# Altium PCB Copy of NRF_remote_control_Save.PcbDoc
Units mil, origin at the board's own origin, x right, y up, seen from the top; angles counter-clockwise.
Board outline 3385.83 x 1811.02 mil, 2 copper layers (Top Layer, Bottom Layer), stack 62.17 mil thick; 69 components, 57 nets, 328 pads, 81 vias.
Unrouted connection lines stored in the file: 39.
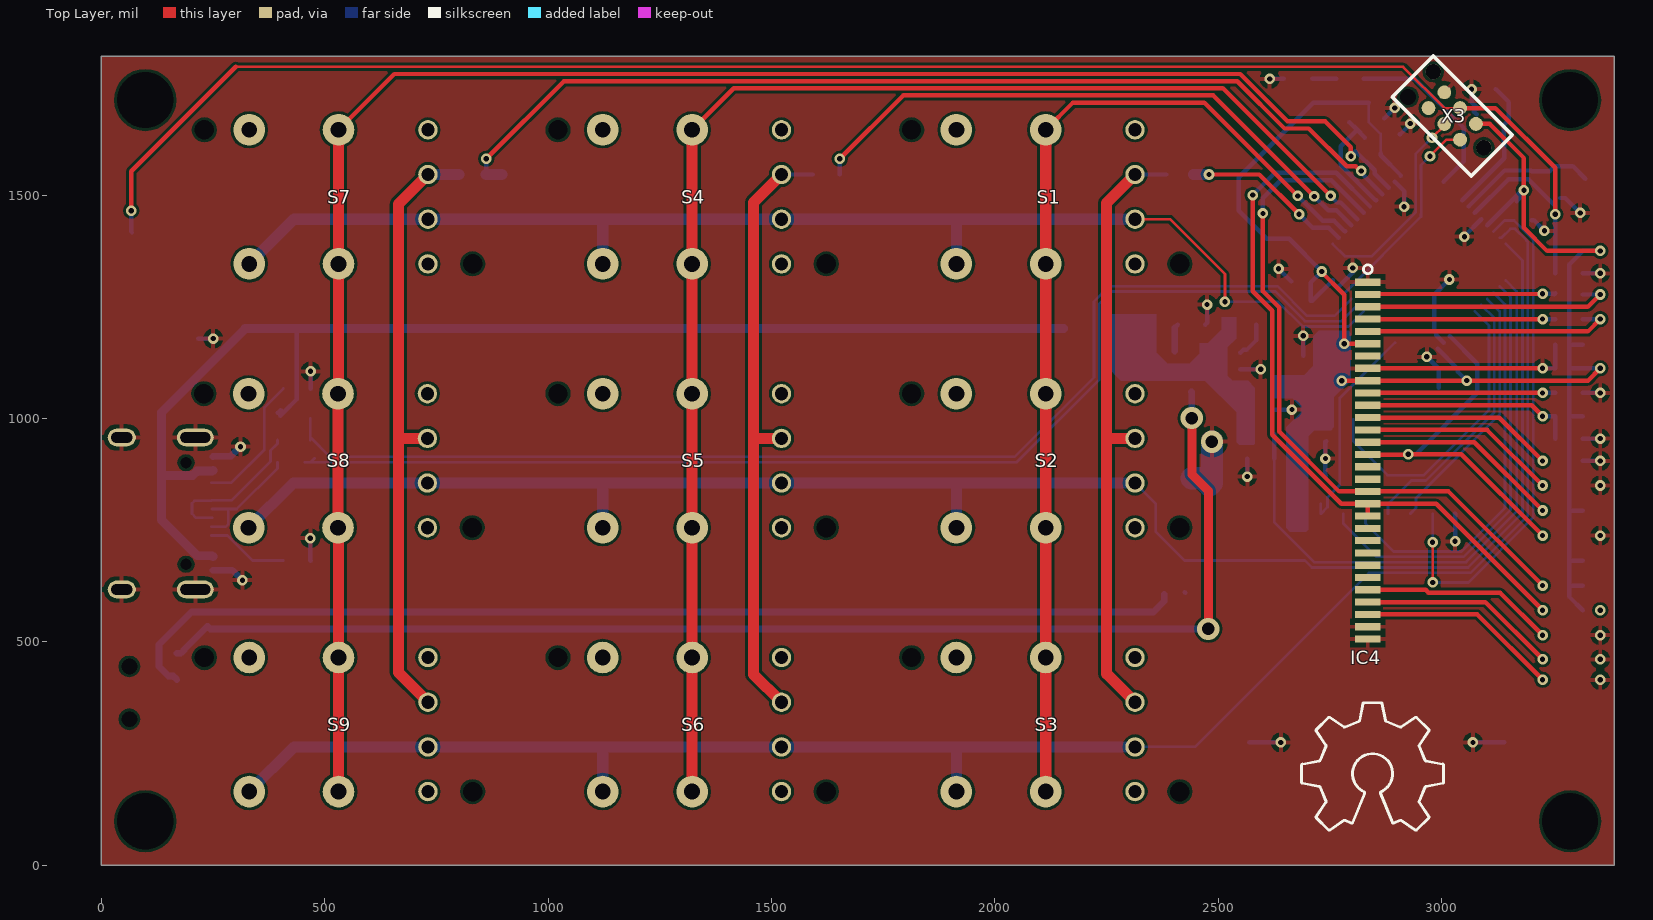
[diagram p0: Top Layer view]
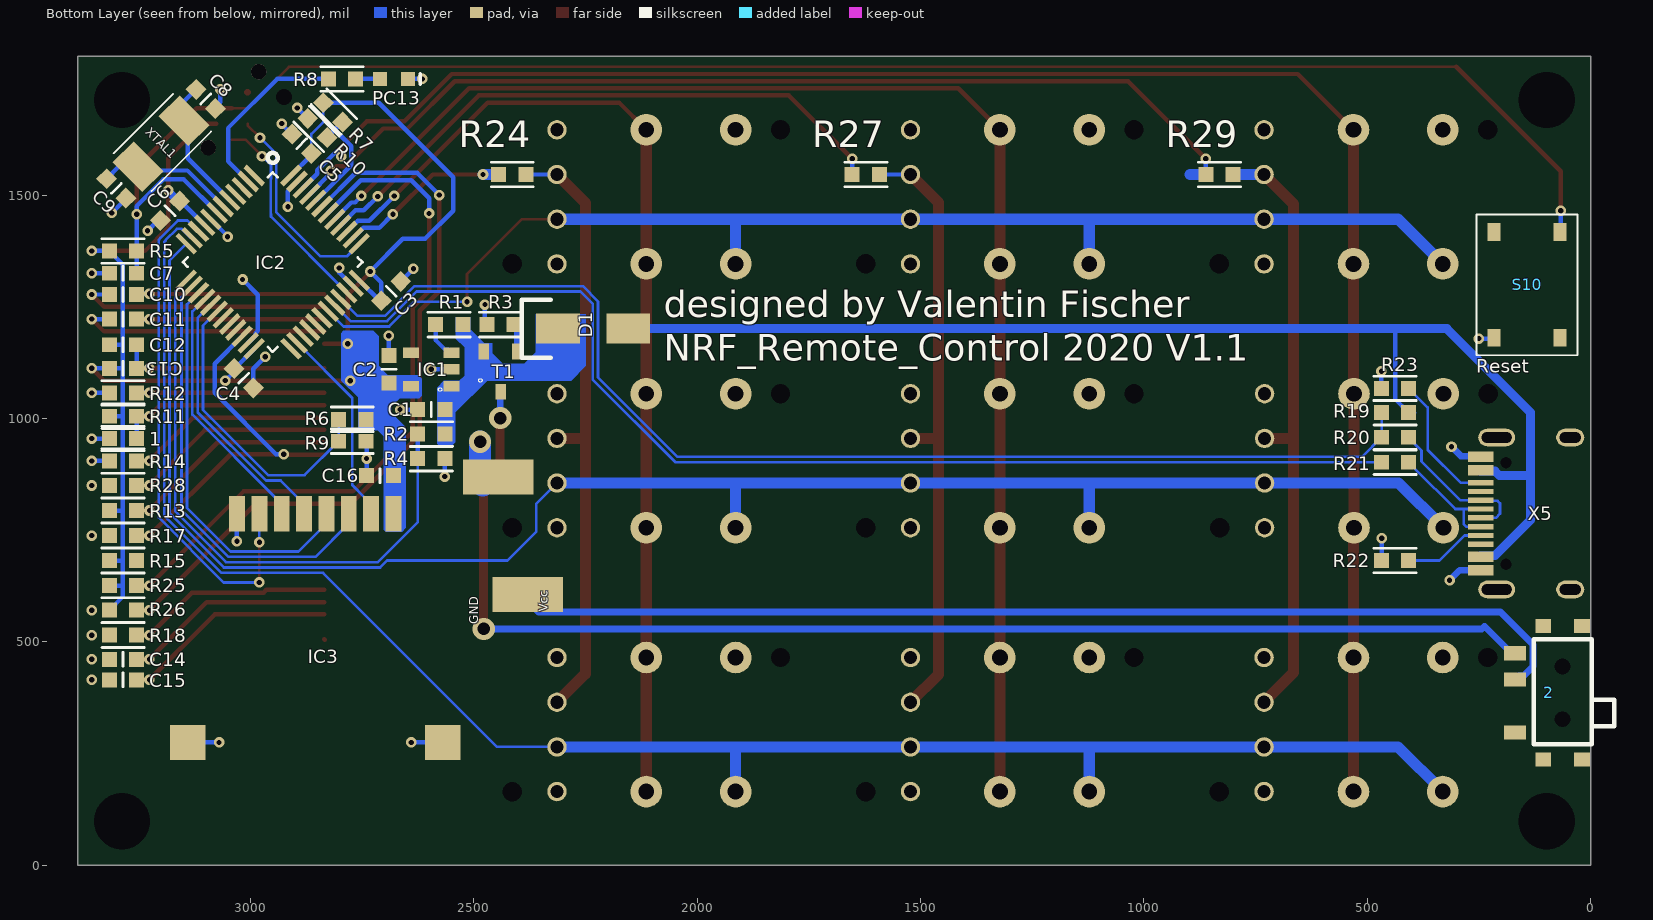
[diagram p1: Bottom Layer view, seen from below]

## Layer stack, top to bottom
Top Solder: solder mask 0.4, Solder Resist, Dk 3.5
Top Layer: signal copper 1.4
Dielectric 1: dielectric 59.3701, FR-4, Dk 4.8
Bottom Layer: signal copper 1.4
Bottom Solder: solder mask 0.4, Solder Resist, Dk 3.5

## Board outline
0,0 3385.83,0 3385.83,1811.02 0,1811.02

## Design rules (kind name [scope] priority, off if disabled: settings)
Clearance [All] p1: gap=6 ignorepadtopadclearanceinfootprint=FALSE except(0: Arc-Hole Track-Hole SMDPad-Hole THPad-Hole Via-Hole Fill-Hole Poly-Hole Region-Hole Text-Hole)
HoleSize [All] p1: absolutevalues=TRUE maxlimit=248.03 minlimit=7.87 maxpercent=80.000 minpercent=20.000
MinimumSolderMaskSliver [All] p1: minsoldermaskwidth=6
PolygonConnect [All] p1: connectstyle=Relief reliefconductorwidth=10 reliefentries=4 polygonreliefangle="90 Angle" airgapwidth=10
RoutingVias [All] p1: holewidth=11.81 width=23.62 viastyle="Through Hole" minholewidth=7.87 minwidth=17.72 maxholewidth=248.03 maxwidth=472.44
SilkToSilkClearance [All] p1: silktosilkclearance=5
SilkToSolderMaskClearance [IsPad] p1: minsilkscreentomaskgap=5 clearancetoexposedcopper=TRUE
SolderMaskExpansion [All] p1: expansion=3
Width [All] p1: maxlimit=100 minlimit=5 preferedwidth=10 minimp=50.000000 maximp=50.000000 favimp=50.000000
26 further rules are at their usual default settings.

## Classes and differential pairs
component class NRF_remote_control_matrix_oled: 1 C10 C11 C12 C13 C14 C15 IC4 R11 R12 R13 R14 R15 R17 R18 R24 R25 R26 R27 R28 R29 S1 S2 S3 S4 S5 S6 S7 S8 S9
component class NRF_remote_control_main: 2 C1 C2 C3 C4 C5 C6 C7 C8 C9 C16 D1 GND IC1 IC2 IC3 PC13 R1 R2 R3 R4 R5 R6 R7 R8 R9 R10 R19 R20 R21 R22 R23 S10 T1 Vcc X3 X5 XTAL1

## Components (designator, comment, footprint, x,y, rotation, side; value= is the part's Value field where it differs from the comment)
1 "10k" SMD-0603-RES 3285,955 r90 bottom
2 "Switch" K3-1296S-J1 63,386 r180 bottom
C1 "1µF" SMD-0603C 2595,1020 r270 bottom
C2 "1µF" SMD-0603C 2690,1110 r0 bottom
C3 "0.10µF" SMD-0603C 2685,1285 r45 bottom
C4 "0.10µF" SMD-0603C 3015,1090 r135 bottom
C5 "0.10µF" SMD-0603C 2885,1615 r315 bottom
C6 "0.10µF" SMD-0603C 3180,1465 r225 bottom
C7 "0.10µF" SMD-0603C 3285,1325 r270 bottom
C8 "20pF" SMD-0603C 3100,1715 r315 bottom
C9 "20pF" SMD-0603C 3300,1515 r315 bottom
C10 "2.2µF" SMD-0603C 3285,1277.5 r90 bottom
C11 "2.2µF" SMD-0603C 3285,1222.44 r90 bottom
C12 "2.2µF" SMD-0603C 3285,1165 r270 bottom
C13 "2.2µF" SMD-0603C 3285,1112.2 r270 bottom
C14 "2.2µF" SMD-0603C 3285,461 r90 bottom
C15 "10µF" SMD-0603C 3285,415 r90 bottom
C16 "0.10µF" SMD-0603C 2710,872 r270 bottom
D1 "SS34" B240A 2233,1201 r0 bottom
GND "SMD_Pad" SMD_Pad 2435,919 r90 bottom (schematic designator X2)
IC1 "AP2112" SOT23-5 2595,1110 r90 bottom
IC2 "STM32F072C8U6" LQFP-48 2950,1350 r225 bottom
IC3 "NRF24" ML01SP4 2679.76,786.81 r0 bottom locked
IC4 "UG-2864KSWLG01" UG-2864KSWLG01 2834.65,905.51 r270 top locked
PC13 "150060SS75000" 0603_A 2678.5,1760 r0 bottom (schematic designator LED1)
R1 "100k" SMD-0603-RES 2555,1210 r90 bottom
R2 "100k" SMD-0603-RES 2595,965 r90 bottom
R3 "100k" SMD-0603-RES 2440,1210 r90 bottom
R4 "100k" SMD-0603-RES 2595,910 r270 bottom
R5 "10k" SMD-0603-RES 3285,1375 r270 bottom
R6 "10k" SMD-0603-RES 2772,998 r90 bottom
R7 "10k" SMD-0603-RES 2815,1685 r315 bottom
R8 "330" SMD-0603-RES 2795,1760 r90 bottom
R9 "10k" SMD-0603-RES 2772,949 r270 bottom
R10 "10k" SMD-0603-RES 2850,1650 r135 bottom
R11 "10k" SMD-0603-RES 3285,1005 r270 bottom
R12 "10k" SMD-0603-RES 3285,1057.09 r270 bottom
R13 "10k" SMD-0603-RES 3285,794 r90 bottom
R14 "10k" SMD-0603-RES 3285,905 r90 bottom
R15 "10k" SMD-0603-RES 3285,682 r270 bottom
R17 "10k" SMD-0603-RES 3285,738 r90 bottom
R18 "390k" SMD-0603-RES 3285,515 r90 bottom
R19 "4.7k" SMD-0603-RES 438,1013 r90 bottom
R20 "20" SMD-0603-RES 438,958 r90 bottom
R21 "20" SMD-0603-RES 438,902 r90 bottom
R22 "5.1k" SMD-0603-RES 438,682 r270 bottom
R23 "5.1k" SMD-0603-RES 438,1067 r90 bottom
R24 "0.0" SMD-0603-RES 2413.86,1546.06 r270 bottom
R25 "4.7k" SMD-0603-RES 3285,626 r270 bottom
R26 "4.7k" SMD-0603-RES 3285,571 r270 bottom
R27 "0.0" SMD-0603-RES 1622.52,1546.06 r270 bottom
R28 "10k" SMD-0603-RES 3285,850 r90 bottom
R29 "0.0" SMD-0603-RES 831.18,1546.06 r270 bottom
S1 "MP86A0BUH-G" MP86A0BUH-G#1 2113.86,1496.06 r270 top locked
S2 "MP86A0BUH-G" MP86A0BUH-G#1 2113.86,905.51 r270 top locked
S3 "MP86A0BUH-G" MP86A0BUH-G#1 2113.86,314.96 r270 top locked
S4 "MP86A0BUH-G" MP86A0BUH-G#1 1322.52,1496.06 r270 top locked
S5 "MP86A0BUH-G" MP86A0BUH-G#1 1322.52,905.51 r270 top locked
S6 "MP86A0BUH-G" MP86A0BUH-G#1 1322.52,314.96 r270 top locked
S7 "MP86A0BUH-G" MP86A0BUH-G#1 531.18,1496.06 r270 top locked
S8 "MP86A0BUH-G" MP86A0BUH-G#1 530,905.51 r270 top locked
S9 "MP86A0BUH-G" MP86A0BUH-G#2 531.18,314.96 r270 top locked
S10 "Button" Button5050 216.54,1181.1 r90 bottom
T1 "AO3401" SOT23 2440,1105 r180 bottom
Vcc "SMD_Pad" SMD_Pad 2389,556 r270 bottom (schematic designator X1)
X3 "ICSP" TC2030-MCP-NL 3094.39,1606.26 r135 top
X5 "USB-C" USB-C 46,787.4 r90 bottom
XTAL1 "Crystal 5032" 5032 3200,1615 r315 bottom
? "OpenHardware" OpenHardware 2845,206 r0 top

## Footprints (in the part's own frame and the unit in brackets; to place one, negate y for a bottom-side part, rotate by r counter-clockwise, add the part's x,y. Pads: shape width x height; smd on the part's side, far side on the other; paste and mask are expansions set on the pad)
0603_A [mm] "Chip LED, 2-Leads, Body 1.6x0.8mm, IPC Medium Density"
  rect 0.8x0.8 smd: 1(-0.8,0) 2(0.8,0)
  silkscreen extent -1.5,-0.3 -1.5,0.3, body extent -0.8,-0.4 0.8,0.4, height 0.7
5032 [mm]
  rect 1.7x2.4 smd: 1(-1.85,0) 2(1.85,0)
  silkscreen extent -2.5,-1.52 2.29,1.52, body extent -2.5,-1.6 2.5,1.6, height 1.31
B240A [mm]
  rect 2.5x1.7 smd: A(-2,0) K(2,0)
  silkscreen extent 2.41,-1.65 4.06,1.65, body extent -2.03,-0.89 2.03,0.89, height 1.52
Button5050 [mm]
  rect 1x0.75 smd: 1(0,0) 2(6,-3.75) 3(0,-3.75) 4(6,0)
  silkscreen extent -1,-4.75 7,1, body extent -0.2,-4.44 6.3,0.64, height 1.52
K3-1296S-J1 [mm] "Toggle Switch C223848"
  rect 1.25x0.8 smd: 1(-2.7,2.25) 2(-2.7,-2.25) 3(-2.7,0.75)
  round 0 hole 0.9: 14(0,-1.5) 14(0,1.5)
  rect 0.9x0.8 smd: ""(-1.1,-3.8) ""(-1.1,3.8) ""(1.1,-3.8) ""(1.1,3.8)
  silkscreen extent -1.65,-2.92 2.92,3.05, body extent -2.5,-3.6 2.35,3.6, height 1.4
LQFP-48 [mil] "LQFP 48 Pins"
  rect 58x11 smd: 1(-166,108) 2(-166,89) 3(-166,69) 4(-166,49) 5(-166,30) 6(-166,10) 7(-166,-10) 8(-166,-30) 9(-166,-49) 10(-166,-69) 11(-166,-89) 12(-166,-108) 25(166,-108) 26(166,-89) 27(166,-69) 28(166,-49) 29(166,-30) 30(166,-10) 31(166,10) 32(166,30) 33(166,49) 34(166,69) 35(166,89) 36(166,108)
  rect 11x58 smd: 13(-108,-166) 14(-89,-166) 15(-69,-166) 16(-49,-166) 17(-30,-166) 18(-10,-166) 19(10,-166) 20(30,-166) 21(49,-166) 22(69,-166) 23(89,-166) 24(108,-166) 37(108,166) 38(89,166) 39(69,166) 40(49,166) 41(30,166) 42(10,166) 43(-10,166) 44(-30,166) 45(-49,166) 46(-69,166) 47(-89,166) 48(-108,166)
  silkscreen extent -176,-142 142,176, body extent -177,-180 177,175, height 58
ML01SP4 [mm] "NRF24"
  rect 0.9x2 smd: CE(1.27,0) CSN(2.54,0) GND(8.89,0) IRQ(7.62,0) MISO(6.35,0) MOSI(5.08,0) SCK(3.81,0) Vcc(0,0)
  rect 2x2 smd: GND(-2.8,13) GND(11.69,13)
  body extent -2.79,0 11.71,18, height 1.8
MP86A0BUH-G#1 [mm] "Button THT"
  round 1.8 hole 0.9: 1(-3.81,0) 1(3.81,0) 2(3.81,-5.08) 3(-3.81,-5.08)
  round 0 hole 1.1: 1(-3.81,-7.625) 1(3.81,7.625)
  round 1.1 hole 0.75: A(-3.81,5.08) B(-1.27,5.08) C(1.27,5.08) D(3.81,5.08)
  body extent -6.22,-8.8 6.28,8.8, height 14.95
MP86A0BUH-G#2 [mm] "Button THT"
  round 1.8 hole 0.9: 1(-3.81,0) 1(3.81,0) 2(3.81,-5.08) 3(-3.81,-5.08)
  round 1.1 hole 0.75: A(-3.81,5.08) B(-1.27,5.08) C(1.27,5.08) D(3.81,5.08)
  round 0 hole 1.1: ""(-3.81,-7.625) ""(3.81,7.625)
  body extent -6.22,-8.8 6.28,8.8, height 14.9
OpenHardware [mil]
  silkscreen extent -158,-128 159,158
SMD-0603-RES [mm]
  rect 0.85x0.85 smd: 1(0,0.775) 2(0,-0.775)
  silkscreen extent -0.7,-1.2 0.7,1.2, body extent -0.4,-0.85 0.4,0.85, height 0.56
SMD-0603C [mm]
  rect 0.85x0.85 smd: 1(0,0.775) 2(0,-0.775)
  silkscreen extent -0.4,0 0.4,0, body extent -0.4,-0.8 0.4,0.8, height 0.9
SMD_Pad [mm]
  rect 2x4 smd: 1(-1.27,0.254)
SOT23 [mm]
  rect 0.6x0.9 smd: D(0,-1.15) G(0.95,1.15) S(-0.95,1.15)
  silkscreen extent -1.25,-0.6 -1.05,-0.4, body extent -1.45,-1.17 1.45,1.43, height 1
SOT23-5 [mm]
  rect 0.6x0.9 smd: 1(-0.95,-1.15) 2(0,-1.15) 3(0.95,-1.15) 4(0.95,1.15) 5(-0.95,1.15)
  silkscreen extent -1.25,-0.6 -1.05,-0.4, body extent -1.4,-1.21 1.4,1.21, height 1.09
TC2030-MCP-NL [mil]
  round 31 smd: 1(50,-25) 2(50,25) 3(100,-25) 4(100,25) 5(150,-25) 6(150,25)
  round 34 hole 35 unplated: A(0,0) B(200,40) C(200,-40)
  silkscreen extent -25,-65 225,65
UG-2864KSWLG01 [mm] "OLED 1,3\" 128x64"
  rect 0.41x1.46 smd: 1(-10.15,0) 2(-9.45,0) 3(-8.75,0) 4(-8.05,0) 5(-7.35,0) 6(-6.65,0) 7(-5.95,0) 8(-5.25,0) 9(-4.55,0) 10(-3.85,0) 11(-3.15,0) 12(-2.45,0) 13(-1.75,0) 14(-1.05,0) 15(-0.35,0) 16(0.35,0) 17(1.05,0) 18(1.75,0) 19(2.45,0) 20(3.15,0) 21(3.85,0) 22(4.54,0) 23(5.24,0) 24(5.94,0) 25(6.64,0) 26(7.34,0) 27(8.04,0) 28(8.74,0) 29(9.44,0) 30(10.14,0)
  body extent -17,-8 17,16.5, height 5
USB-C [mm] "USB-C Buchse"
  round 0 hole 0.65: 1(-2.89,3.65) 1(2.89,3.65)
  rect 0.3x1.45 smd: CC1(-1.25,5.095) CC2(1.75,5.095) DN(-0.75,5.095) DN(0.25,5.095) DP(-0.25,5.095) DP(0.75,5.095) SBU1(-1.75,5.095) SBU2(1.25,5.095)
  oval 1x1.6 hole 0.6 slot 1.2 at 90 deg: GND(-4.32,0) GND(4.32,0)
  oval 1x2.1 hole 0.6 slot 1.7 at 90 deg: GND(-4.32,4.18) GND(4.32,4.18)
  rect 0.6x1.45 smd: GND(-3.225,5.095) GND(3.225,5.095) VBUS(-2.45,5.095) VBUS(2.45,5.095)
  body extent -4.47,-2.35 4.47,5.55, height 3.21

## Part data
1 R5 R6 R7 R9 R10 R11 R12 R13 R14 R15 R17 R28: library part ERJ-3EKF1002V, "RES SMD 10K OHM 1% 1/10W 0603", Digi-Key Part Number=P10.0KHCT-ND, Manufacturer="Panasonic Electronic Components", Operating Temperature="-55°C ~ 155°C", Package / Case="0603 (1608 Metric)", Power (Watts)="0.1W, 1/10W", Supplier Device Package=0603, Temperature Coefficient=±100ppm/°C, Tolerance=±1%, @ qty=1500, Composition="Thick Film", Datasheets=http://industrial.panasonic.com/www-cgi/jvcr13pz.cgi?E+PZ+3+AOA0002+ERJ3EKF1002V+7+WW, Factory Stock=0, Failure Rate=-, Features="Automotive AEC-Q200", Height - Seated (Max)="0.022\" (0.55mm)", Image=//media.digikey.com/Photos/Panasonic%20Photos/MFG_ERJ-P6W%20Series.jpg, Minimum Quantity=1, Number of Terminations=2, Packaging="Cut Tape (CT)", Part Number=ERJ-3EKF1002V, Part Status=Active, Quantity Available=6703141, Series=ERJ, Size / Dimension="0.063\" L x 0.031\" W (1.60mm x 0.80mm)", Unit Price (USD)=0.00379
C1 C2: library part GCM188R71C105KA64D, "CAP CER 1UF 16V X7R 0603", Digi-Key Part Number=490-5241-1-ND, Manufacturer="Murata Electronics North America", Operating Temperature="-55°C ~ 125°C", Package / Case="0603 (1608 Metric)", Ratings=AEC-Q200, Temperature Coefficient=X7R, Tolerance=±10%, Voltage=16V, @ qty=0, Applications=Automotive, Datasheets=http://www.murata.com/~/media/webrenewal/support/library/catalog/products/capacitor/mlcc/c03e.ashx, Factory Stock=0, Features=-, Height - Seated (Max)=-, Image=//media.digikey.com/Renders/Murata%20Renders/0603%28GCM188%29.jpg, Lead Spacing=-, Lead Style=-, Minimum Quantity=1, Mounting Type="Surface Mount, MLCC", Packaging="Cut Tape (CT)", Part Number=GCM188R71C105KA64D, Part Status=Active, Quantity Available=9243, Series=GCM, Size / Dimension="0.063\" L x 0.031\" W (1.60mm x 0.80mm)", Thickness (Max)="0.035\" (0.90mm)", Unit Price (USD)=0.24
C3 C4 C5 C6 C7 C8 C9 C16: library part GCM188R71C104KA37J, "CAP CER 0.1UF 16V X7R 0603", Digi-Key Part Number=490-8015-1-ND, Manufacturer="Murata Electronics North America", Operating Temperature="-55°C ~ 125°C", Package / Case="0603 (1608 Metric)", Ratings=AEC-Q200, Temperature Coefficient=X7R, Tolerance=±10%, Voltage=16V, @ qty=0, Applications=Automotive, Datasheets=http://www.murata.com/~/media/webrenewal/support/library/catalog/products/capacitor/mlcc/c03e.ashx, Factory Stock=0, Features=-, Height - Seated (Max)=-, Image=//media.digikey.com/Renders/Murata%20Renders/0603%28GCM188%29.jpg, Lead Spacing=-, Lead Style=-, Minimum Quantity=1, Mounting Type="Surface Mount, MLCC", Packaging="Cut Tape (CT)", Part Number=GCM188R71C104KA37J, Part Status=Active, Quantity Available=17844, Series=GCM, Size / Dimension="0.063\" L x 0.031\" W (1.60mm x 0.80mm)", Thickness (Max)="0.035\" (0.90mm)", Unit Price (USD)=0.18
C10 C11 C12 C13 C14: library part GRM188C81C225KA12D, "CAP CER 2.2UF 16V X6S 0603", Digi-Key Part Number=490-11993-1-ND, Manufacturer="Murata Electronics North America", Operating Temperature="-55°C ~ 105°C", Package / Case="0603 (1608 Metric)", Ratings=-, Temperature Coefficient=X6S, Tolerance=±10%, Voltage=16V, @ qty=0, Applications="General Purpose", Datasheets=http://www.murata.com/~/media/webrenewal/support/library/catalog/products/capacitor/mlcc/c02e.pdf, Factory Stock=0, Features=-, Height - Seated (Max)=-, Image=//media.digikey.com/Renders/Murata%20Renders/ZRB-SERIES-0402.jpg, Lead Spacing=-, Lead Style=-, Minimum Quantity=1, Mounting Type="Surface Mount, MLCC", Packaging="Cut Tape (CT)", Part Number=GRM188C81C225KA12D, Part Status=Active, Quantity Available=1215, Series=GRM, Size / Dimension="0.063\" L x 0.031\" W (1.60mm x 0.80mm)", Thickness (Max)="0.035\" (0.90mm)", Unit Price (USD)=0.2
C15: library part GRM185R60J106ME15D, "CAP CER 10UF 6.3V X5R 0603", Digi-Key Part Number=490-10467-1-ND, Manufacturer="Murata Electronics North America", Operating Temperature="-55°C ~ 85°C", Package / Case="0603 (1608 Metric)", Ratings=-, Temperature Coefficient=X5R, Tolerance=±20%, Voltage=6.3V, @ qty=0, Applications="General Purpose", Datasheets=http://www.murata.com/~/media/webrenewal/support/library/catalog/products/capacitor/mlcc/c02e.pdf, Factory Stock=0, Features="Derating Recommended", Height - Seated (Max)=-, Image=//media.digikey.com/Renders/Murata%20Renders/ZRB-SERIES-0402.jpg, Lead Spacing=-, Lead Style=-, Minimum Quantity=1, Mounting Type="Surface Mount, MLCC", Packaging="Cut Tape (CT)", Part Number=GRM185R60J106ME15D, Part Status=Active, Quantity Available=25068, Series=GRM, Size / Dimension="0.063\" L x 0.031\" W (1.60mm x 0.80mm)", Thickness (Max)="0.022\" (0.55mm)", Unit Price (USD)=0.36
D1: library part B240A, "Shottkydiode"
IC4: "OLED 1,3\" 128x64"
PC13: "SMD mono-color Chip LED, WL-SMCW, Super Red", Color="Super Red", ComponentLink1Description="Manufacturer URL", ComponentLink1URL=http://www.we-online.com, ComponentLink2Description=Datasheet, ComponentLink2URL=http://katalog.we-online.com/led/datasheet/150060SS75000.pdf, PackageReference=0603_A, PartNumber=150060SS75000
R1 R2 R3 R4 R19: library part ERJ-3EKF4701V, "RES SMD 4.7K OHM 1% 1/10W 0603", Digi-Key Part Number=P4.70KHCT-ND, Manufacturer="Panasonic Electronic Components", Operating Temperature="-55°C ~ 155°C", Package / Case="0603 (1608 Metric)", Power (Watts)="0.1W, 1/10W", Supplier Device Package=0603, Temperature Coefficient=±100ppm/°C, Tolerance=±1%, @ qty=1500, Composition="Thick Film", Datasheets=http://industrial.panasonic.com/www-cgi/jvcr13pz.cgi?E+PZ+3+AOA0002+ERJ3EKF4701V+7+WW, Factory Stock=0, Failure Rate=-, Features="Automotive AEC-Q200", Height - Seated (Max)="0.022\" (0.55mm)", Image=//media.digikey.com/Photos/Panasonic%20Photos/MFG_ERJ-P6W%20Series.jpg, Minimum Quantity=1, Number of Terminations=2, Packaging="Cut Tape (CT)", Part Number=ERJ-3EKF4701V, Part Status=Active, Quantity Available=999380, Series=ERJ, Size / Dimension="0.063\" L x 0.031\" W (1.60mm x 0.80mm)", Unit Price (USD)=0.00379
R8: library part ERJ-3EKF3300V, "RES SMD 330 OHM 1% 1/10W 0603", Digi-Key Part Number=P330HCT-ND, Manufacturer="Panasonic Electronic Components", Operating Temperature="-55°C ~ 155°C", Package / Case="0603 (1608 Metric)", Power (Watts)="0.1W, 1/10W", Supplier Device Package=0603, Temperature Coefficient=±100ppm/°C, Tolerance=±1%, @ qty=1500, Composition="Thick Film", Datasheets=http://industrial.panasonic.com/www-cgi/jvcr13pz.cgi?E+PZ+3+AOA0002+ERJ3EKF3300V+7+WW, Factory Stock=0, Failure Rate=-, Features="Automotive AEC-Q200", Height - Seated (Max)="0.022\" (0.55mm)", Image=//media.digikey.com/Photos/Panasonic%20Photos/MFG_ERJ-P6W%20Series.jpg, Minimum Quantity=1, Number of Terminations=2, Packaging="Cut Tape (CT)", Part Number=ERJ-3EKF3300V, Part Status=Active, Quantity Available=670984, Series=ERJ, Size / Dimension="0.063\" L x 0.031\" W (1.60mm x 0.80mm)", Unit Price (USD)=0.00379
R18: library part ERJ-3EKF3903V, "RES SMD 390K OHM 1% 1/10W 0603", Digi-Key Part Number=P390KHCT-ND, Manufacturer="Panasonic Electronic Components", Operating Temperature="-55°C ~ 155°C", Package / Case="0603 (1608 Metric)", Power (Watts)="0.1W, 1/10W", Supplier Device Package=0603, Temperature Coefficient=±100ppm/°C, Tolerance=±1%, @ qty=1500, Composition="Thick Film", Datasheets=http://industrial.panasonic.com/www-cgi/jvcr13pz.cgi?E+PZ+3+AOA0002+ERJ3EKF3903V+7+WW, Factory Stock=0, Failure Rate=-, Features="Automotive AEC-Q200", Height - Seated (Max)="0.022\" (0.55mm)", Image=//media.digikey.com/Photos/Panasonic%20Photos/MFG_ERJ-P6W%20Series.jpg, Minimum Quantity=1, Number of Terminations=2, Packaging="Cut Tape (CT)", Part Number=ERJ-3EKF3903V, Part Status=Active, Quantity Available=25618, Series=ERJ, Size / Dimension="0.063\" L x 0.031\" W (1.60mm x 0.80mm)", Unit Price (USD)=0.00379
R20 R21: library part ERJ-3EKF20R0V, "RES SMD 20 OHM 1% 1/10W 0603", Digi-Key Part Number=P20.0HCT-ND, Manufacturer="Panasonic Electronic Components", Operating Temperature="-55°C ~ 155°C", Package / Case="0603 (1608 Metric)", Power (Watts)="0.1W, 1/10W", Supplier Device Package=0603, Temperature Coefficient=±100ppm/°C, Tolerance=±1%, @ qty=1500, Composition="Thick Film", Datasheets=http://industrial.panasonic.com/www-cgi/jvcr13pz.cgi?E+PZ+3+AOA0002+ERJ3EKF20R0V+7+WW, Factory Stock=0, Failure Rate=-, Features="Automotive AEC-Q200", Height - Seated (Max)="0.022\" (0.55mm)", Image=//media.digikey.com/Photos/Panasonic%20Photos/MFG_ERJ-P6W%20Series.jpg, Minimum Quantity=1, Number of Terminations=2, Packaging="Cut Tape (CT)", Part Number=ERJ-3EKF20R0V, Part Status=Active, Quantity Available=92419, Series=ERJ, Size / Dimension="0.063\" L x 0.031\" W (1.60mm x 0.80mm)", Unit Price (USD)=0.00379
R22 R23: library part ERJ-3GEYJ512V, "RES SMD 5.1K OHM 5% 1/10W 0603", Digi-Key Part Number=P5.1KGCT-ND, Manufacturer="Panasonic Electronic Components", Operating Temperature="-55°C ~ 155°C", Package / Case="0603 (1608 Metric)", Power (Watts)="0.1W, 1/10W", Supplier Device Package=0603, Temperature Coefficient=±200ppm/°C, Tolerance=±5%, @ qty=1500, Composition="Thick Film", Datasheets=http://industrial.panasonic.com/www-cgi/jvcr13pz.cgi?E+PZ+3+AOA0001+ERJ3GEYJ512V+7+WW, Factory Stock=0, Failure Rate=-, Features="Automotive AEC-Q200", Height - Seated (Max)="0.022\" (0.55mm)", Image=//media.digikey.com/Photos/Panasonic%20Photos/MFG_ERJ-P6W%20Series.jpg, Minimum Quantity=1, Number of Terminations=2, Packaging="Cut Tape (CT)", Part Number=ERJ-3GEYJ512V, Part Status=Active, Quantity Available=285626, Series=ERJ, Size / Dimension="0.063\" L x 0.031\" W (1.60mm x 0.80mm)", Unit Price (USD)=0.00321
R24 R27 R29: library part ERJ-3GEY0R00V, "RES SMD 0.0OHM JUMPER 1/10W 0603", Digi-Key Part Number=P0.0GCT-ND, Manufacturer="Panasonic Electronic Components", Operating Temperature="-55°C ~ 155°C", Package / Case="0603 (1608 Metric)", Power (Watts)="0.1W, 1/10W", Supplier Device Package=0603, Temperature Coefficient=-, Tolerance=Jumper, @ qty=1500, Composition="Thick Film", Datasheets=http://industrial.panasonic.com/www-cgi/jvcr13pz.cgi?E+PZ+3+AOA0001+ERJ3GEY0R00V+7+WW, Factory Stock=0, Failure Rate=-, Features="Automotive AEC-Q200", Height - Seated (Max)="0.022\" (0.55mm)", Image=//media.digikey.com/Photos/Panasonic%20Photos/MFG_ERJ-P6W%20Series.jpg, Minimum Quantity=1, Number of Terminations=2, Packaging="Cut Tape (CT)", Part Number=ERJ-3GEY0R00V, Part Status=Active, Quantity Available=4813372, Series=ERJ, Size / Dimension="0.063\" L x 0.031\" W (1.60mm x 0.80mm)", Unit Price (USD)=0.00352
R25 R26: library part ERJ-PA3F4701V, "RES SMD 4.7K OHM 1% 1/4W 0603", Digi-Key Part Number=P4.7KBYCT-ND, Manufacturer="Panasonic Electronic Components", Operating Temperature="-55°C ~ 155°C", Package / Case="0603 (1608 Metric)", Power (Watts)="0.25W, 1/4W", Supplier Device Package=0603, Temperature Coefficient=±100ppm/°C, Tolerance=±1%, @ qty=1500, Composition="Thick Film", Datasheets=https://industrial.panasonic.com/cdbs/www-data/pdf/RDA0000/AOA0000C243.pdf, Factory Stock=0, Failure Rate=-, Features="Automotive AEC-Q200, Pulse Withstanding", Height - Seated (Max)="0.022\" (0.55mm)", Image=//media.digikey.com/Photos/Panasonic%20Photos/MFG_ERJ-P6W%20Series.jpg, Minimum Quantity=1, Number of Terminations=2, Packaging="Cut Tape (CT)", Part Number=ERJ-PA3F4701V, Part Status=Active, Quantity Available=14801, Series=ERJ, Size / Dimension="0.063\" L x 0.031\" W (1.60mm x 0.80mm)", Unit Price (USD)=0.02372
S1 S2 S3 S4 S5 S6 S7 S8 S9: "Button mit LED"
S10: "6.1x3.7x2.5mm"
T1: "AO3401 MOSFET 30V"
X5: library part "USB-C 16P"
XTAL1: library part 5032
?: "OpenHardware Logo"

## Free pads (board coordinates)
  round 0 hole 125.98: 0(98.43,98.43) 0(98.43,1712.6) 0(3287.4,98.43) 0(3287.4,1712.6)

## Via types
v1: diameter 23.62, hole 11.81, Top Layer to Bottom Layer, tented both sides, 78 vias
v2: diameter 50, hole 28, Top Layer to Bottom Layer, 2 vias
v3: diameter 50, hole 28, Top Layer to Bottom Layer, tented both sides, 1 vias

## Nets (pads, with @x,y where several pads share a name; then routed paths per layer and width w, separated by ;. In a path a pad name is that pad's centre, name@x,y a point inside that pad or via, vN(x,y) a via of type N, cw(c..) or ccw(c..) an arc to the next point about the centre after c; other vN are vias at no path point)
3,3V: C2.1 C3.1 C4.1 C5.1 C6.1 C12.2 C13.2 C16.1 IC1.5 IC2.9 IC2.24 IC2.36 IC2.48 IC3.Vcc IC4.6 IC4.9 R5.2 R6.2 R7.2 R13.1 R15.2 R25.2 R26.2 X3.1 | length 4064.8
  Top Layer w10: v1@2729,1331 2729,1330 2782.32,1276.68 v1(2782.32,1167.32) IC4.6 ; v1(2776.65,1084.65) IC4.9 v1@3048.67,1084.65 ; v1(3056,1084.76) 3327.56,1084.76 v1(3355,1112.21) ; X3.1 3107.71,1659.29 3184.15,1582.85 v1(3184.15,1511) 3184.15,1426.85 3236,1375 v1(3355,1375)
  Bottom Layer w6: R7.2 2836.58,1663.42 2863.42,1636.58 C5.1
  Bottom Layer w10: IC1.5 2683.11,1072.6 C2.1 2690,998 ; IC3.Vcc 2679.49,787.09 2679.49,865 2690,875.51 2690,998 ; R6.2 2690,998 ; IC2.36@2756.25,1308.28 IC2.36 2710.69,1263.42 C3.1 2706.58,1303.58 v1(2732,1329) 2659,1402 2609,1402 2546,1465 2546,1540 2712.58,1706.58 R7.2 ; v1@2773.91,1163.39 2781.39,1163.39 2782.32,1164.32 v1(2782.32,1167.32) ; C5.1 2863.42,1589.31 IC2.48 ; IC2.24 3035.69,1111.58 C4.1 3036.58,1104.19 v1(3056,1084.76) ; IC2.9 3180.3,1511 v1(3184.15,1511) 3184.15,1502.56 C6.1@3168.17,1486.58 ; 3289.64,1164.64 3315.15,1164.64 C12.2 ; R26.2 3286,600.51 3286,623 ; R25.2 3289,626 3286,623 ; R15.2 3287,682 3286,683 ; R13.1 3287,794 3286,793 ; 3315.51,1005 3288,1005 3286,1003 ; v1(3355,1112.21) C13.2 3286.8,1112.2 3286,1113 ; v1(3355,1375) R5.2 3286,1345.49 3286,1113 ; 3286,623 3286,683 ; 3286,683 3286,793 ; 3286,793 3286,1003 ; 3286,1003 3286,1113
  other v1: 3355,571
GND: 1.1 C1.2 C2.2 C3.2 C4.2 C5.2 C6.2 C7.2 C8.1 C9.1 C12.1 C13.1 C14.1 C15.1 C16.2 GND.1 IC1.2 IC2.8 IC2.23 IC2.35 IC2.47 IC3.GND IC4.1 IC4.8 IC4.29 IC4.30 PC13.1 R3.1 R4.1 R9.1 R10.1 R12.2 R14.1 R17.1 R18.1 R22.2 R23.1 R28.1 S10.1 X3.5 X5.GND | length 2259.3
  Top Layer w10: IC4.30@2833.74,505 IC4.30@2834.65,505.91 ; IC4.8 v1@3217.5,1112.2
  Top Layer w15: X3.5 X3.5@3007,1730
  Bottom Layer w10: S10.1@217.64,1178.78 v1(250.71,1178.78) ; v1(468,732) 468,682.51 R22.2 ; R23.1 v1(468.51,1105.49) ; R3.1 2475,1214.49 v1(2475,1255) ; IC1.2 v1(2595,1110) ; R4.1 2564.49,870.51 v1(2565,870) ; IC3.GND@2569.53,275 v1(2640,275) ; v1(2615,1760) PC13.1 ; C1.2 v1@2660,1020 ; v1(2635,1335) C3.2 ; C2.2 v1(2690,1185) ; C16.2 2740,872.51 v1(2740,910.35) ; v1@2741.49,908.49 2740,909.98 v1(2740,910.35) ; R9.1 2740,947.51 v1(2740,910.35) ; IC2.35 v1@2800.8,1326.67 ; v1(2801,1337) 2800.8,1336.8 v1@2800.8,1326.67 ; v1@2801.39,1337.39 2801.39,1327.26 v1@2800.8,1326.67 ; R10.1 v1(2895,1695) ; IC2.47 2895.55,1529.61 2916.81,1508.35 2916.81,1474.81 v1(2916,1474) ; C5.2 2907.89,1636.58 2931.31,1660 v1(2930,1660) ; v1(2967,1138) 2993.42,1111.58 C4.2 ; IC2.23 2987.83,1186.3 2987.83,1191.25 2983.19,1195.89 2983.19,1277.19 3017,1311 v1(3017.38,1311) ; IC3.GND@3029.76,786.81 3030,787.05 v1(3030,725) ; v1(3051,1407) 3051,1408.57 IC2.8 ; v1(3067,1737) 3067,1708 3078.42,1696.58 C8.1 ; v1(3070,275) IC3.GND@3140,275 ; C8.1@3071.95,1686.95 C8.1@3078.42,1680.48 ; C6.2 3206.58,1443.42 v1(3230,1420) ; v1(3226,1112.21) C13.1 C12.1 ; C9.1@3265.48,1493.42 3276.58,1493.42 v1(3310,1460) ; R14.1 v1(3355,905) ; 1.1 v1(3355,955) ; R12.2 v1(3355,1057.09) ; C7.2 v1(3355,1325)
  Bottom Layer w15: X5.GND@249.8,660.43 293.57,660.43 v1(316,638) ; X5.GND@249.8,914.37 251.21,915.78 290.57,915.78 v1(311.79,937)
  Bottom Layer w50: GND.1@2440.95,866.14 2463.86,866.14 2480,850 2486,856 v3(2486,948)
  other v1: 3355,415 3355,461 3355,515 3355,738 3355,850 2665,1020
Net1_2: 1.2 IC4.11 R11.1 | length 480
  Top Layer w10: IC4.11 3201.47,1029.53 v1(3226,1005)
  Bottom Layer w10: v1(3226,1005) R11.1 1.2
Net2_1: 2.1 T1.D | length 2883
  Top Layer w20: v2(2441,1001) 2441,875 2478,838 v2(2478,529)
  Bottom Layer w15: 2.1 178.16,474.58 186.41,482.83 186.41,483.41 238,535 244,529 v2(2478,529) ; T1.D 2441,1058.72 v2(2441,1001)
NetC1_1: C1.1 D1.K IC1.1 R1.2 R2.2 T1.S | length 43.4
  Bottom Layer w10: T1.S 2477.4,1156.18 2480.35,1153.23 T1.S@2483.58,1150 ; IC1.1 IC1.1@2555.63,1072.6
  Bottom Layer w20: D1.K D1.K@2323.75,1188.99 ; T1.S@2477.4,1144.37 T1.S
NetC7_1: C7.1 IC2.7 R5.1 S10.2 X3.3 | length 4004.1
  Top Layer w6: 301,1787 2914,1787 3006.36,1694.64 X3.3
  Top Layer w10: v1(67,1465) 67,1553 301,1787 ; X3.3 3120.36,1694.64 3254,1561 v1(3254,1457)
  Bottom Layer w10: v1(67,1465) 67,1419.22 S10.2 ; IC2.7 3149.14,1535 3195,1535 3254.49,1475.51 3254.49,1457 R5.1 C7.1
NetC8_2: C8.2 IC2.5 XTAL1.1 | length 303.8
  Bottom Layer w10: IC2.5 3140,1582.43 3140,1615.26 3138.75,1616.5 3138.75,1656.76 XTAL1.1 3149.95,1667.95 3149.95,1708.2 C8.2
NetC9_2: C9.2 IC2.6 XTAL1.2 | length 311.5
  Bottom Layer w10: IC2.6 3140.86,1555 3200.26,1555 3201.5,1553.75 3241.76,1553.75 XTAL1.2 3252.95,1564.95 3293.2,1564.95 C9.2
NetC10_1: C10.1 IC4.3 | length 574.8
  Top Layer w10: IC4.3 3327.5,1250 v1(3355,1277.5)
  Bottom Layer w10: C10.1 v1@3352.5,1277.5 ; v1(3355,1277.5) v1@3352.5,1277.5 ; v1@3355,1280 v1@3352.5,1277.5
NetC10_2: C10.2 IC4.2 | length 460.1
  Top Layer w10: IC4.2 3219.12,1278.97 v1(3226,1279) ; v1(3226,1279) 3219.12,1279 3217.62,1277.5 v1(3226,1279) ; v1(3226,1279) 3220,1280 3222.44,1277.56 v1(3226,1279)
  Bottom Layer w10: v1@3220,1275 3224,1279 v1(3226,1279) 3250.49,1279 3251.99,1277.5 C10.2@3254.49,1280
NetC11_1: C11.1 IC4.5 | length 571.3
  Top Layer w10: IC4.5 3327.44,1194.88 v1(3355,1222.44)
  Bottom Layer w10: C11.1 v1(3355,1222.44)
NetC11_2: C11.2 IC4.4 | length 411.3
  Top Layer w10: IC4.4 v1@3217.5,1222.44
  Bottom Layer w10: v1(3226,1222.44) C11.2
NetC14_2: C14.2 IC4.27 | length 444.4
  Top Layer w10: IC4.27 3098.02,588.98 v1(3226,461)
NetC15_2: C15.2 IC4.28 | length 452
  Top Layer w10: IC4.28 3079.58,561.42 v1(3226,415)
NetIC1_3: IC1.3 R1.1 | length 81.9
  Bottom Layer w10: IC1.3 2556.54,1154.21 2564.21,1154.21 2585.51,1175.51 R1.1
NetIC2_2: IC2.2 R8.1 | length 408.6
  Bottom Layer w10: R8.1 2940,1760 3050,1650 3050,1575.86 IC2.2
NetIC2_10: IC2.10 IC3.IRQ | length 1166.6
  Top Layer w6: v1@2979.76,644.24 v1(2979.76,723.24)
  Bottom Layer w6: v1(2979.76,723.24) IC3.IRQ ; v1(2980,633) 3059.85,633 3205,778.15 3205,1400 3201.5,1403.5 3201.5,1403.97 3162.47,1443 3140.58,1443 IC2.10
NetIC2_11: IC2.11 S3.2 S3.C S6.2 S6.C S9.2 S9.C | length 4016.8
  Bottom Layer w6: S3.C 2447.96,264.96 2837.43,654.43 3064.31,654.43 3193,783.12 3193,1395.03 3189.5,1398.53 3189.5,1399 3164.09,1424.41 3153.81,1424.41 3133.85,1404.45 IC2.11
  Bottom Layer w10: 1122.52,260.63 1126.85,264.96 ; 1913.86,260.63 1918.19,264.96
  Bottom Layer w25: S9.2 431.18,264.96 S9.C 1126.85,264.96 S6.C 1918.19,264.96 S3.C ; S6.2 1122.52,260.63 ; S3.2 1913.86,260.63
NetIC2_12: IC2.12 S2.2 S2.C S5.2 S5.C S8.2 S8.C | length 3879.4
  Bottom Layer w6: S2.C 2360,809.37 2360,747 2425,682 2694.03,682 2709.6,666.43 3059.34,666.43 3181,788.09 3181,1353.76 IC2.12
  Bottom Layer w10: 1122.52,851.77 1126.26,855.51 ; 1913.86,851.18 1918.19,855.51
  Bottom Layer w25: S8.2 430,855.51 S8.C 1126.26,855.51 S5.C 1918.19,855.51 S2.C ; S5.2 1122.52,851.77 ; S2.2 1913.86,851.18
NetIC2_13: IC2.13 R2.1 R4.2 | length 1350.9
  Bottom Layer w6: R4.2 2625.51,767.49 2714.57,678.43 3054.37,678.43 3168,792.06 3168,1284.47 3143.75,1308.72 IC2.13
  Bottom Layer w10: R4.2 R2.1
NetIC2_14: IC2.14 IC3.CSN | length 980.5
  Bottom Layer w6: IC3.CSN 2779.76,765.24 2854.57,690.43 3049.4,690.43 3154,795.03 3154,1271.86 IC2.14
NetIC2_15: IC2.15 IC3.SCK | length 892.4
  Bottom Layer w6: IC3.SCK 2829.76,765.24 2892.57,702.43 3044.43,702.43 3142,800 3142,1255.58 IC2.15
NetIC2_16: IC2.16 IC3.MISO | length 575
  Bottom Layer w6: IC3.MISO 2942.48,799.53 2942.48,821.48 3130,1009 3130,1239.3 IC2.16
NetIC2_17: IC2.17 IC3.MOSI | length 597.1
  Bottom Layer w6: IC3.MOSI 2879.76,808.46 2932.3,861 2965.03,861 3118,1013.97 3118,1224.43 IC2.17
NetIC2_18: IC2.18 R6.1 R9.2 | length 678.2
  Bottom Layer w6: R6.1 R9.2 2878.51,873 2960.06,873 3106,1018.94 3106,1208.14 IC2.18
NetIC2_22: IC2.22 IC4.15 R15.1 R17.2 | length 830.4
  Top Layer w10: IC4.15 v1@2925,919.29 ; v1(2925,920) 3044,920 v1(3226,738)
  Bottom Layer w10: v1(2925,920) 2925.27,920.27 2942.64,920.27 3080,1057.63 3080,1122.42 IC2.22
NetIC2_26: IC2.26 IC3.CE | length 473.2
  Bottom Layer w6: IC3.CE@2729.76,808.46 IC3.CE 2744.48,801.53 2744.48,823.48 2772,851 2772,1046.14 IC2.26
NetIC2_31: IC2.31 S1.2 S1.C S4.2 S4.C S7.2 S7.C | length 2889.2
  Top Layer w6: S1.C 2391.94,1446.06 2515,1323 v1(2515,1261)
  Bottom Layer w6: v1(2515,1261) 2634.06,1261 2689.25,1205.81 2791.67,1205.81 IC2.31
  Bottom Layer w10: 1122.52,1441.73 1126.85,1446.06 ; 1913.86,1441.73 1918.19,1446.06
  Bottom Layer w25: S7.2 431.18,1446.06 S7.C 1126.85,1446.06 S4.C 1918.19,1446.06 S1.C ; S4.2 1122.52,1441.73 ; S1.2 1913.86,1441.73
NetIC2_32: IC2.32 R21.1 | length 2668.8
  Bottom Layer w6: R21.1@455.51,902 2049,902 2234,1087 2234,1257.03 2260.97,1284 2628.03,1284 2694.22,1217.81 2775.38,1217.81 IC2.32 ; R21.1 R21.1@477.51,911
NetIC2_33: IC2.33 R19.1 R20.1 | length 2696.4
  Bottom Layer w6: R20.1@467.51,952 R19.1@467.51,1000 ; R20.1 512.51,914 2044.03,914 2222,1091.97 2222,1262 2256,1296 2633,1296 2699.19,1229.81 2760.51,1229.81 IC2.33
NetIC2_34: IC2.34 X3.2 | length 467.3
  Top Layer w6: v1(2974,1587) 3010.93,1623.93 X3.2
  Bottom Layer w6: IC2.34 2954,1451.58 2954,1457.03 2954.38,1457.41 2954.38,1535.83 2954,1536.21 2954,1567 v1(2974,1587)
NetIC2_37: IC2.37 X3.4 | length 462.5
  Top Layer w6: v1(2978.49,1628.49) 3006,1656 X3.4
  Bottom Layer w6: IC2.37 2784.26,1363 2843,1363 2942.38,1462.38 2942.38,1530.86 2942,1531.24 2942,1592 v1(2978.49,1628.49)
NetIC2_38: IC2.38 R24.2 | length 384
  Top Layer w10: v1(2479.37,1546.06) 2591.94,1546.06 v1(2681,1457)
  Bottom Layer w10: v1(2681,1457) 2711.59,1426.41 2747.02,1426.41 2768.98,1404.45 IC2.38
  Bottom Layer w25: R24.2 v1(2479.37,1546.06)
NetIC2_39: IC2.39 S1.1@2113.86,1346.06 S1.1@2113.86,1646.06 S2.1@2113.86,755.51 S2.1@2113.86,1055.51 S3.1@2113.86,164.96 S3.1@2113.86,464.96 | length 2295.8
  Top Layer w10: S1.1@2113.86,1646.06 2174.8,1707 2469,1707 v1(2678,1498)
  Top Layer w25: S3.1@2113.86,164.96 2113.86,464.96 2113.86,755.51 2113.86,1055.51 2113.86,1346.06 S1.1@2113.86,1646.06
  Bottom Layer w10: v1(2678,1498) 2733.59,1442.41 2759.3,1442.41 2783.12,1418.59 IC2.39
NetIC2_40: IC2.40 R27.2 | length 1359
  Top Layer w10: v1(1653.03,1581.06) 1794.97,1723 2489,1723 v1(2715,1497)
  Bottom Layer w10: R27.2 v1(1653.03,1581.06) ; v1(2715,1497) 2746,1466 2764.7,1466 IC2.40
NetIC2_41: IC2.41 S4.1@1322.52,1346.06 S4.1@1322.52,1646.06 S5.1@1322.52,755.51 S5.1@1322.52,1055.51 S6.1@1322.52,164.96 S6.1@1322.52,464.96 | length 3129.4
  Top Layer w10: S4.1@1322.52,1646.06 1415.46,1739 2510.5,1739 v1(2751.5,1498)
  Top Layer w25: S6.1@1322.52,164.96 1322.52,464.96 1322.52,755.51 1322.52,1055.51 1322.52,1346.06 S4.1@1322.52,1646.06
  Bottom Layer w10: v1@2751.5,1497 2752,1497 2765.61,1483.39 2774.18,1483.39 IC2.41
NetIC2_42: IC2.42 IC4.18 R25.1 | length 1546.4
  Top Layer w10: v1@2597,1459 v1@2600,1456 ; v1(2600,1459) v1@2600,1456 ; v1(3226,626) 3015.39,836.61 IC4.18 2770.39,836.61 2637,970 2637,1247.63 2600,1284.63 v1@2600,1456
  Bottom Layer w10: v1(2600,1459) 2599.81,1459.19 2599.81,1492.81 2640,1533 2752.86,1533 IC2.42
NetIC2_43: IC2.43 IC4.19 IC4.20 R26.1 | length 1664.6
  Top Layer w10: v1(2577,1500) 2577,1285 2621,1241 2621,963.37 2775.32,809.06 IC4.19 ; IC4.20 IC4.19 ; v1(3226,571) 2987.94,809.06 IC4.19
  Bottom Layer w10: v1(2577,1500) 2627,1550 2764.14,1550 IC2.43
NetIC2_44: IC2.44 R7.1 R10.2 | length 256
  Bottom Layer w10: R7.1 2810.92,1645.92 ; R10.2 2810.92,1645.92 ; IC2.44 2852.15,1488.59 2774.19,1566.55 2774.19,1609.19 2810.92,1645.92
NetIC2_45: IC2.45 R29.2 | length 2255.2
  Top Layer w10: v1(861.69,1581.06) 1035.63,1755 2542.37,1755 2648.37,1649 2702.74,1649 2787.55,1564.19 2807.33,1564.19 2817.52,1554 v1(2820,1554)
  Bottom Layer w10: R29.2 v1(861.69,1581.06) ; v1(2820,1554) 2820,1549.3 IC2.45
  Bottom Layer w25: R29.2 896.69,1546.06
NetIC2_46: IC2.46 S7.1@531.18,1346.06 S7.1@531.18,1646.06 S8.1@530,755.51 S8.1@530,1055.51 S9.1 | length 4015.4
  Top Layer w10: S8.1@530,755.51 S8.1@531.18,754.33 ; S8.1@530,1055.51 S8.1@531.18,1056.69 ; S7.1@531.18,1646.06 656.12,1771 2549,1771 2655,1665 2739,1665 2797,1607 v1(2797,1587)
  Top Layer w25: S8.1@530,755.51 S8.1@530,1055.51 ; S9.1@531.18,164.96 531.18,464.96 S8.1@531.18,754.33 ; S8.1@531.18,1056.69 531.18,1346.06 S7.1@531.18,1646.06
  Bottom Layer w10: v1(2797,1587) 2797,1587.74 2807.26,1598 2850,1555.26 2850,1547.58 IC2.46
NetIC4_10: IC4.10 R12.1 | length 411.3
  Top Layer w10: IC4.10 v1@3217.5,1057.09
  Bottom Layer w10: v1(3226,1057.09) R12.1
NetIC4_12: IC4.12 R14.2 | length 431.5
  Top Layer w10: IC4.12 3129.03,1001.97 v1(3226,905)
NetIC4_13: IC4.13 R28.2 | length 442.9
  Top Layer w10: IC4.13 3101.59,974.41 v1(3226,850)
NetIC4_14: IC4.14 R13.2 | length 454.7
  Top Layer w10: IC4.14 3073.15,946.85 v1(3226,794)
NetIC4_26: IC4.26 R18.2 | length 433.4
  Top Layer w10: IC4.26 2964.2,616.54 2970.55,610.19 3130.81,610.19 v1(3226,515)
NetLED1_2: PC13.2 R8.2 | length 54.5
  Bottom Layer w10: PC13.2 R8.2
NetR3_2: R3.2 T1.G | length 62.6
  Bottom Layer w10: R3.2@2402.6,1203.11 R3.2
  Bottom Layer w15: T1.G R3.2@2402.6,1203.11
NetR20_2: R20.2 X5.DP | length 341.1
  Bottom Layer w6: X5.DP@247.83,777.56 246.59,777.56 212.44,777.56 203,787 203,810 208.81,815.81 246.71,815.81 247.83,816.93 291.93,816.93 379,904 379,928 394.49,943.49 R20.2@394.49,952
NetR21_2: R21.2 X5.DN | length 272.6
  Bottom Layer w6: X5.DN@246.59,757.87 278.87,757.87 284.13,763.13 284.13,795.38 286,797.24 ; X5.DN@247.83,797.24 286,797.24 ; R21.2@394.49,902 394.49,888.49 303.24,797.24 286,797.24
NetR22_1: R22.1 X5.CC1 | length 184.2
  Bottom Layer w6: X5.CC1 282.81,738.19 339,682 R22.1
NetR23_2: R23.2 X5.CC2 | length 303.5
  Bottom Layer w6: X5.CC2 291.3,856.3 365,930 365,1024.51 R23.2
NetR24_1: R24.1 S1.B S2.B S3.B | length 1367.4
  Top Layer w25: S3.B 2250,428.82 2250,955.51 ; S2.B 2250,955.51 ; S1.B 2250,1482.2 2250,955.51
  Bottom Layer w10: S1.B R24.1
NetR27_1: R27.1 S4.B S5.B S6.B | length 1364.9
  Top Layer w25: S6.B 1460,427.48 1460,955.51 ; S5.B 1460,955.51 ; S4.B 1460,1483.54 1460,955.51
  Bottom Layer w10: S4.B R27.1
NetR29_1: R29.1 S7.B S8.B S9.B | length 1370.4
  Top Layer w25: S8.B 665,955.51 ; S9.B 665,431.14 665,955.51 ; S7.B 665,1479.88 665,955.51
  Bottom Layer w25: S7.B R29.1
VBUS: D1.A R19.2 X5.VBUS | length 2826.9
  Bottom Layer w10: R19.2@395.49,1013 R19.2@401.49,1019 ; R19.2@400.49,1006 R19.2 438,1043.51 438,1201
  Bottom Layer w20: X5.VBUS@249.8,690.94 247.99,692.76 214.5,692.76 135,772.26 135,869 ; X5.VBUS@249.8,883.86 247.99,882.05 214.5,882.05 204.84,872.39 138.39,872.39 135,869 ; D1.A 438,1201 322.04,1201 135,1013.96 135,869
Vcc: 2.3 Vcc.1 | length 2407.7
  Bottom Layer w10: Vcc.1@2425,611 Vcc.1@2425.94,610.06
  Bottom Layer w15: 2.3 161.05,423.78 150.22,423.78 129.21,444.79 129.21,493.94 202.27,567 2355,567 2379,591 Vcc.1
pads on no net: 2. 2.2 2.14 IC1.4 IC2.1 IC2.3 IC2.4 IC2.19 IC2.20 IC2.21 IC2.25 IC2.27 IC2.28 IC2.29 IC2.30 IC4.7 IC4.16 IC4.17 IC4.21 IC4.22 IC4.23 IC4.24 IC4.25 R11.2 S1.1@1813.66,1646.06 S1.1@2414.06,1346.06 S1.3 S1.A S1.D S2.1@1813.66,1055.51 S2.1@2414.06,755.51 S2.3 S2.A S2.D S3.1@1813.66,464.96 S3.1@2414.06,164.96 S3.3 S3.A S3.D S4.1@1022.32,1646.06 S4.1@1622.72,1346.06 S4.3 S4.A S4.D S5.1@1022.32,1055.51 S5.1@1622.72,755.51 S5.3 S5.A S5.D S6.1@1022.32,464.96 S6.1@1622.72,164.96 S6.3 S6.A S6.D S7.1@230.98,1646.06 S7.1@831.38,1346.06 S7.3 S7.A S7.D S8.1@229.8,1055.51 S8.1@830.2,755.51 S8.3 S8.A S8.D S9. S9.3 S9.A S9.D S10.3 S10.4 X3.6 X3.A X3.B X3.C X5.1 X5.SBU1 X5.SBU2

## Polygon pours and split planes (outlines as drawn)
GND on Top Layer "Top Layer-No Net" (solid, pour order 6): 0,1811.02 3385.83,1811.02 3385.83,0 0,0
no net on Top Layer "Top Layer-No Net" (solid, pour order 2): 2325,1210

## Other copper
Bottom Layer:
  region net 3,3V: 2792,1196 2797,1191 2797,1085 2759,1047 2759,980 2753,974 2715,974 2701,960 2701,751 2697,747 2660,747 2652,755 2652,980 2685,1013 2685,1026 2666,1045 2622,1045 2616,1051 2616,1089 2624,1097 2692,1097 2713,1118 2713,1184 2725,1196
  region net NetC1_1: 2361,1233.5 2361,1148 2387,1122 2435,1122 2459,1146 2459,1168 2476,1168 2508,1200 2508,1227 2540,1227 2540,1179 2520,1159 2520,1096 2532,1084 2567,1084 2582,1069 2582,944 2579,941 2547,941 2541,947 2541,1015 2540,1015 2470,1085 2282,1085 2249,1118 2249,1233.5

## Silkscreen, mask and mechanical layers (free items; w line width, h text height)
Top Overlay:
  circle w6: c2835,1334 r10
Bottom Overlay:
  text "designed by Valentin Fischer" at 2075,1227 h60
  text "NRF_Remote_Control 2020 V1.1" at 2075,1129 h60
  text "Reset" at 256,1102 h30
Mechanical 1:
  the board outline again, w20